# EAGLE board Sch1r2 (EAGLE 9.5.1)
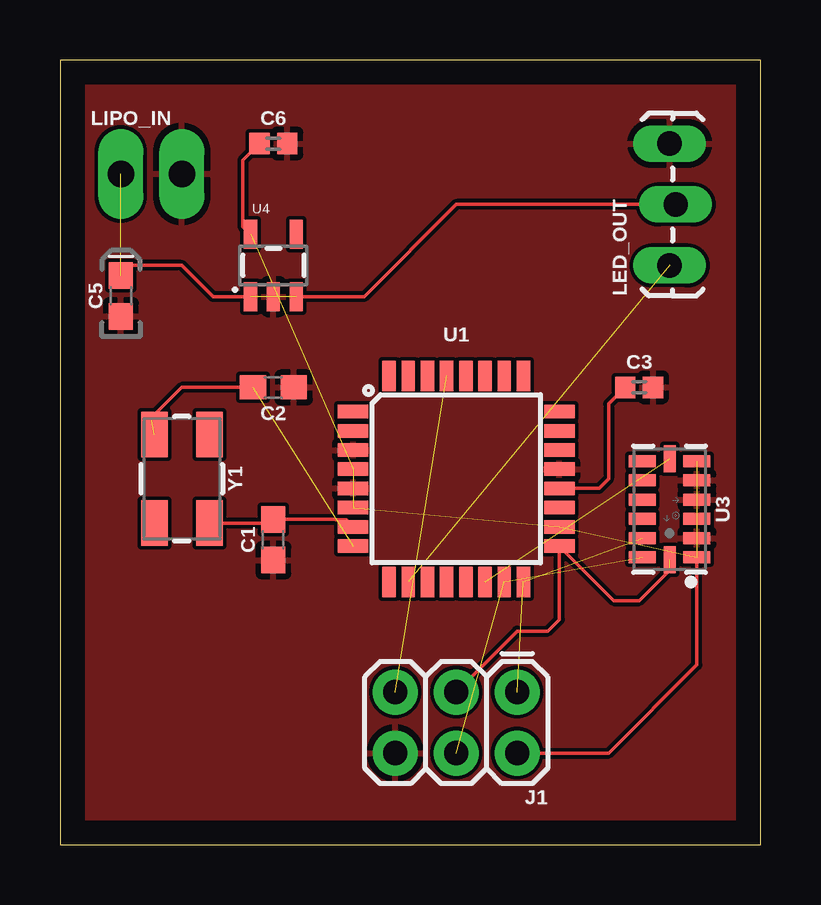
[diagram p0: board, top side]
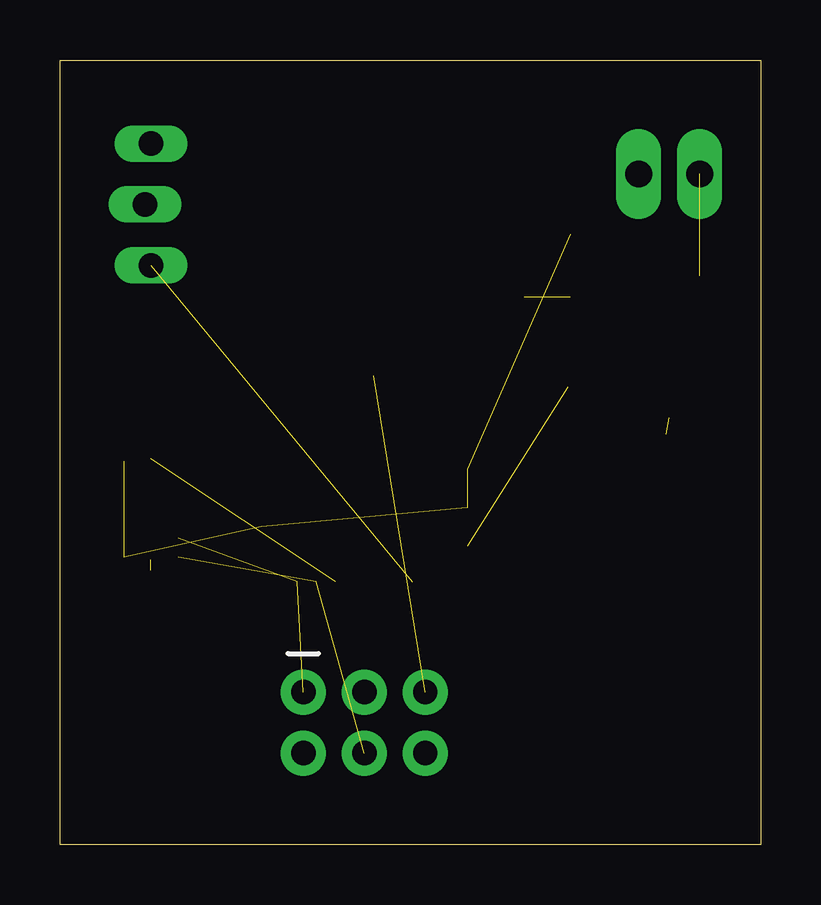
[diagram p1: board, bottom side, seen from below]

Size 29.19 x 32.69 mm. Coordinates in mm from the lower left corner, seen from the top.
Outline: 0,0 29.19,0 29.19,32.69 0,32.69 0,0
Copper layers (1*16): Top 0.035mm / dielectric 1.5mm / Bottom 0.035mm
Design rules "default": minimum track width 6mil, minimum drill 0.35mm, track to track 6mil, track to pad 6mil, pad to pad 6mil, via to via 6mil, smd to smd 6mil, copper to edge 40mil, drill to drill 6mil, minimum pad ring 10mil, minimum via ring 8mil, stop-mask expansion 4mil, vias tented up to drill 0mil, thermal gap 10mil

## Footprints (pad centres in the part's own frame; a part is rotated, then mirrored left to right if it is on the bottom)
0603 = smd 1.1 x 1: 1 -0.85,0; 2 0.85,0
0402 = smd 0.85 x 0.9: 1 -0.58,0; 2 0.58,0
0603-POLAR = smd 1.1 x 1: + 0.85,0; - -0.85,0
2X3 = drill 1.016 pad 1.88: 1 0,0; 2 0,2.54; 3 2.54,0; 4 2.54,2.54; 5 5.08,0; 6 5.08,2.54
1X03_LOCK_LONGPADS = drill 1.016 long: 1 0,0; 2 2.54,-0.254; 3 5.08,0
1X02_LONGPADS = drill 1.118 pad 1.88 long: 1 0,0; 2 2.54,0
TQFP32-08 = smd 1.27 x 0.559: 1 -4.293,2.8; 2 -4.293,2; 3 -4.293,1.2; 4 -4.293,0.4; 5 -4.293,-0.4; 6 -4.293,-1.2; 7 -4.293,-2; 8 -4.293,-2.8; 17 4.293,-2.8; 18 4.293,-2; 19 4.293,-1.2; 20 4.293,-0.4; 21 4.293,0.4; 22 4.293,1.2; 23 4.293,2; 24 4.293,2.8 | smd 0.559 x 1.27: 9 -2.8,-4.293; 10 -2,-4.293; 11 -1.2,-4.293; 12 -0.4,-4.293; 13 0.4,-4.293; 14 1.2,-4.293; 15 2,-4.293; 16 2.8,-4.293; 25 2.8,4.293; 26 2,4.293; 27 1.2,4.293; 28 0.4,4.293; 29 -0.4,4.293; 30 -1.2,4.293; 31 -2,4.293; 32 -2.8,4.293
LGA-14 = smd 0.5 x 1.124: 1 2,1.138; 2 1.2,1.138; 3 0.4,1.138; 4 -0.4,1.138; 5 -1.2,1.138; 6 -2,1.138; 8 -2,-1.13; 9 -1.2,-1.138; 10 -0.4,-1.138; 11 0.4,-1.138; 12 1.2,-1.138; 13 2,-1.138 | smd 1.124 x 0.5: 7 -2.1,0; 14 2.1,0
SOT23-5 = smd 0.55 x 1.2: 1 -0.95,-1.3; 2 0,-1.3; 3 0.95,-1.3; 4 0.95,1.3; 5 -0.95,1.3
CRYSTAL-SMD-5X3.2-4PAD = smd 1.9 x 1.1: 1 -1.85,-1.15; 2 1.85,-1.15; 3 1.85,1.15; 4 -1.85,1.15

## Placement (x,y rotation side)
C1  22pF  [0603]  8.89,12.7 90 top
C2  22pF  [0603]  8.89,19.05 180 top
C3  0.1uF  [0402]  24.13,19.05 0 top
C5  10uF  [0603-POLAR]  2.54,22.86 90 top
C6  1.0uF  [0402]  8.89,29.21 0 top
J1  AVR_SPI_PROG_3X2PTH  [2X3]  19.05,6.35 180 top
LED_OUT  [1X03_LOCK_LONGPADS]  25.4,24.13 90 top
LIPO_IN  [1X02_LONGPADS]  2.54,27.94 0 top
U1  ATMEGA328P_TQFP  [TQFP32-08]  16.51,15.24 0 top
U3  ADXL345  [LGA-14]  25.4,13.97 270 top
U4  3.3V/150mA  [SOT23-5]  8.89,24.13 0 top
Y1  8MHz  [CRYSTAL-SMD-5X3.2-4PAD]  5.08,15.24 270 top

## Library data of the parts
C1 C2 = SparkFun-Capacitors; PROD_ID: CAP-07876
C3 = SparkFun-Capacitors; PROD_ID: CAP-12416
C5 = SparkFun-Capacitors; PROD_ID: CAP-13210
C6 = SparkFun-Capacitors; PROD_ID: CAP-12417
J1 LED_OUT LIPO_IN = SparkFun-Connectors
U1 = SparkFun-IC-Microcontroller; PROD_ID: IC-09069
U3 = SparkFun-Sensors; PROD_ID: IC-09097; SF_ID: SEN-09045
U4 = SparkFun-IC-Power; PROD_ID: VREG-00822
Y1 = SparkFun-Clocks; PROD_ID: XTAL-09431

## Nets
3VDC: C6.1 J1.2 U1.4 U1.6 U1.18 U3.1 U3.6 U4.5
GND: C1.1 C2.1 C3.2 C5.- C6.2 J1.6 LED_OUT.3 LIPO_IN.2 U1.3 U1.5 U1.21 U3.2 U3.4 U3.5 U4.2
LIPO_RAW: C5.+ LED_OUT.2 LIPO_IN.1 U4.1 U4.3
MISO: J1.1 U1.16 U3.12
MOSI: J1.4 U1.15 U3.13
N$1: C1.2 U1.7 Y1.3
N$2: C2.2 U1.8 Y1.1
N$3: LED_OUT.1 U1.10
N$8: C3.1 U1.20
N$14: U1.14 U3.7
RESET: J1.5 U1.29
SCK: J1.3 U1.17 U3.14

## Tracks (layer width: path | path; a pad name or v marks a point on that pad's centre or on a via)
3VDC  (5 unrouted)
  Top 0.152: C6.1 7.62,28.52 7.62,25.75 U4.5 | U3.1 26.54,7.49 22.86,3.81 J1.2
GND
  pour Top: -1.27,34.29 -1.27,-1.27 30.48,-1.27 30.48,34.29
LIPO_RAW  (2 unrouted)
  Top 0.152: U4.3 10.16,22.83 12.67,22.83 16.51,26.67 LED_OUT.2 | U4.1 6.38,22.83 5.08,24.13 2.96,24.13 C5.+
MISO  (2 unrouted)
MOSI  (2 unrouted)
N$1
  Top 0.152: U1.7 11.93,13.53 11.49,13.53 11.47,13.55 C1.2 8.73,13.39 Y1.3
N$2  (2 unrouted)
  Top 0.152: 3.81,17.78 5.08,19.05 C2.2
N$3  (1 unrouted)
N$8
  Top 0.152: U1.20 22.46,14.84 22.86,15.24 22.86,18.36 C3.1
N$14  (1 unrouted)
RESET  (1 unrouted)
SCK  (1 unrouted)
  Top 0.152: J1.3 19.05,8.89 20.32,8.89 20.8,9.37 U1.17 23.08,10.16 24.13,10.16 25.4,11.43